# Altium PCB BaseBoard.PcbDoc (part 1 of 2)
Units mm, origin at the board's own origin, x right, y up, seen from the top; angles counter-clockwise.
Board outline 100 x 100 mm, 2 copper layers (Top Layer, Bottom Layer); 106 components, 85 nets, 460 pads, 124 vias.
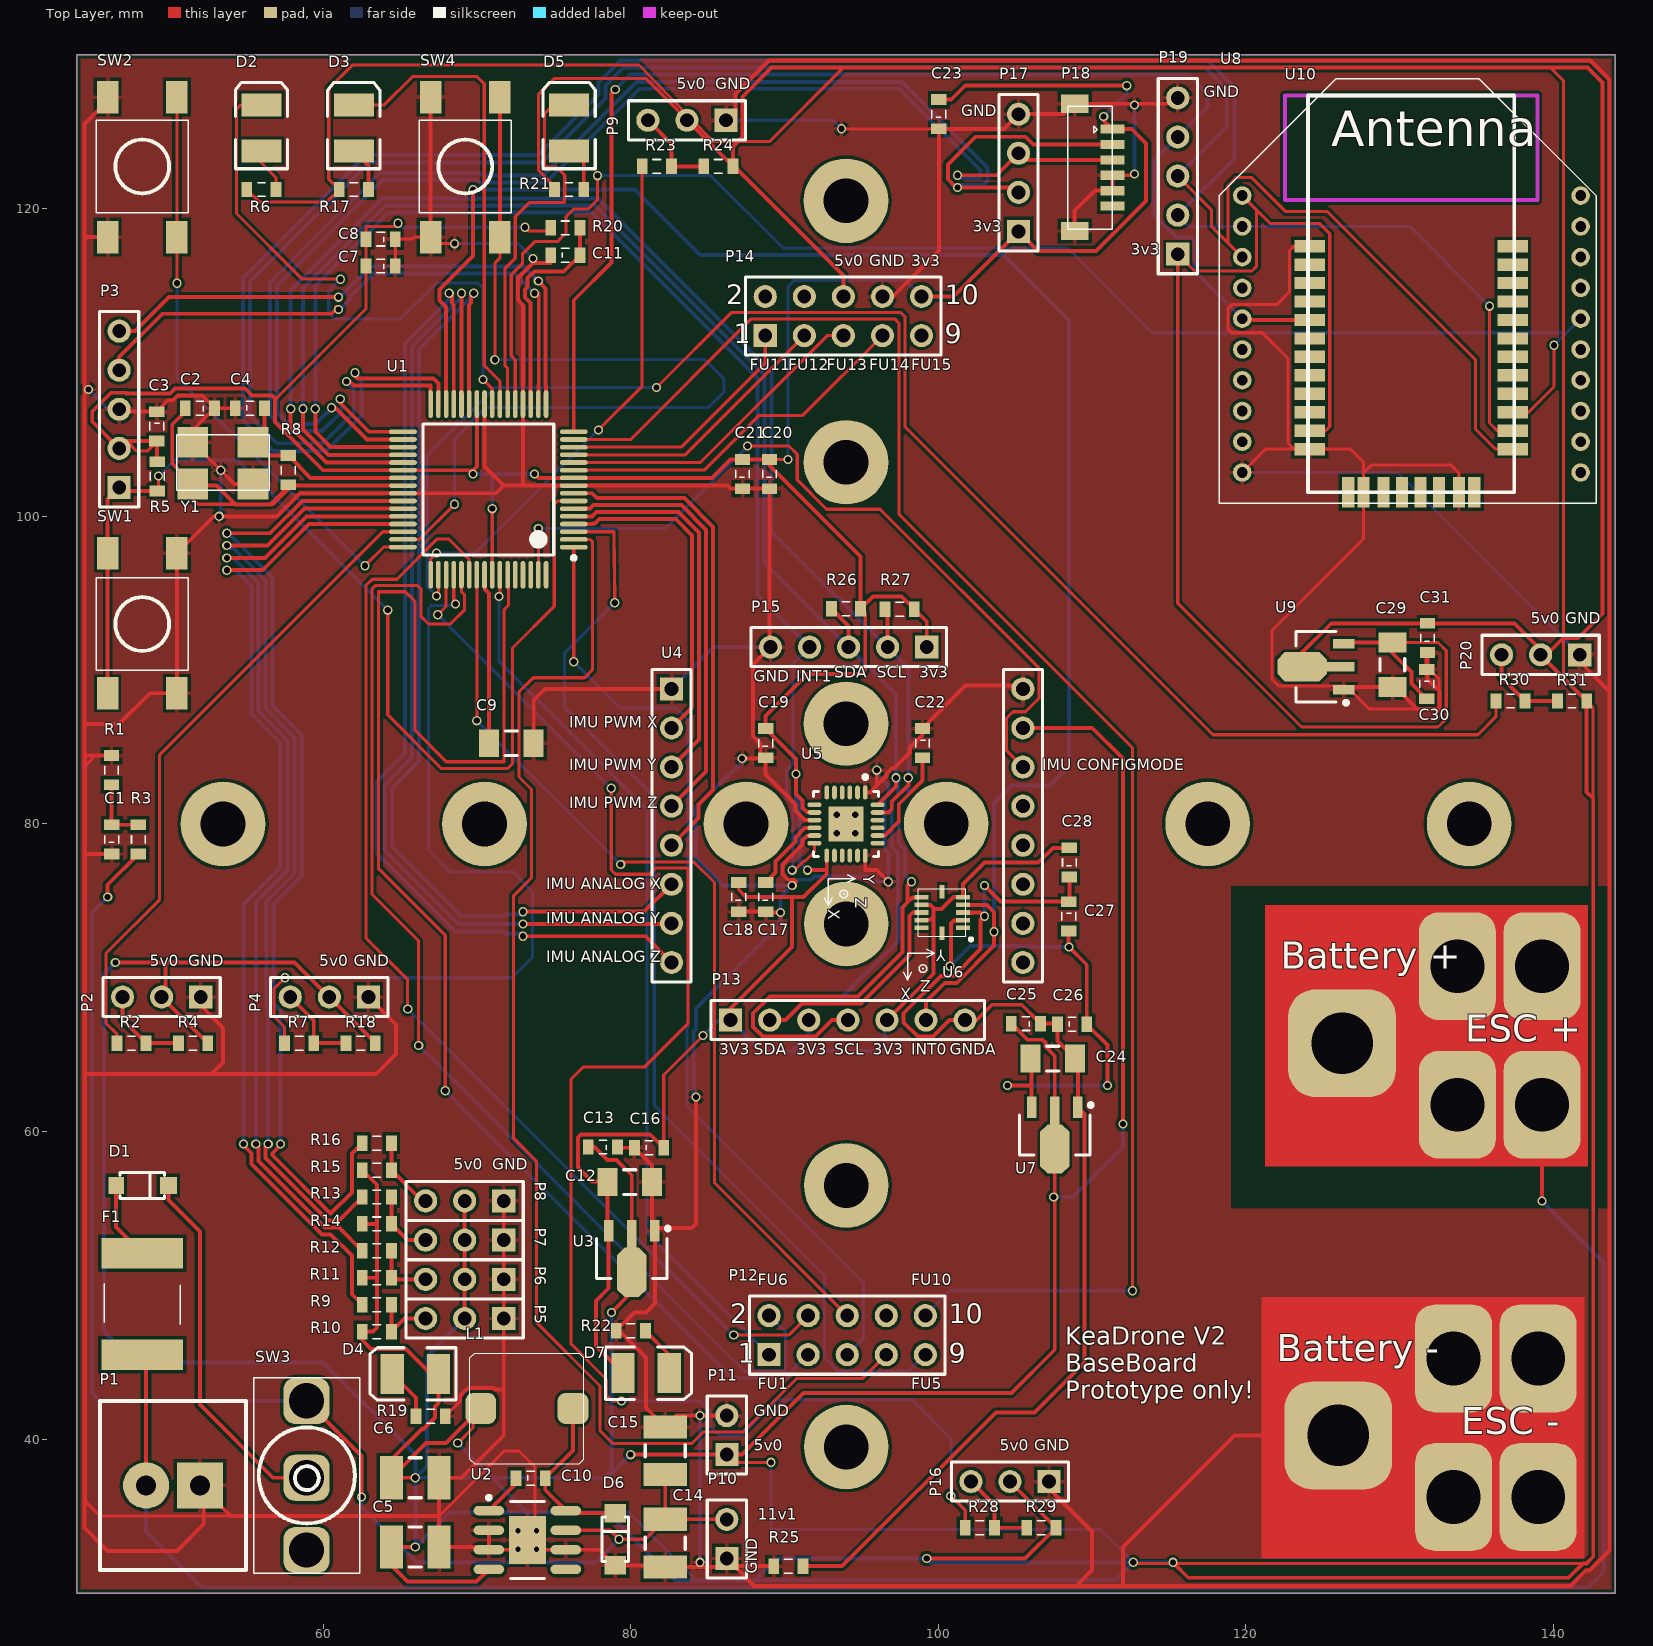
[diagram p0: Top Layer view]
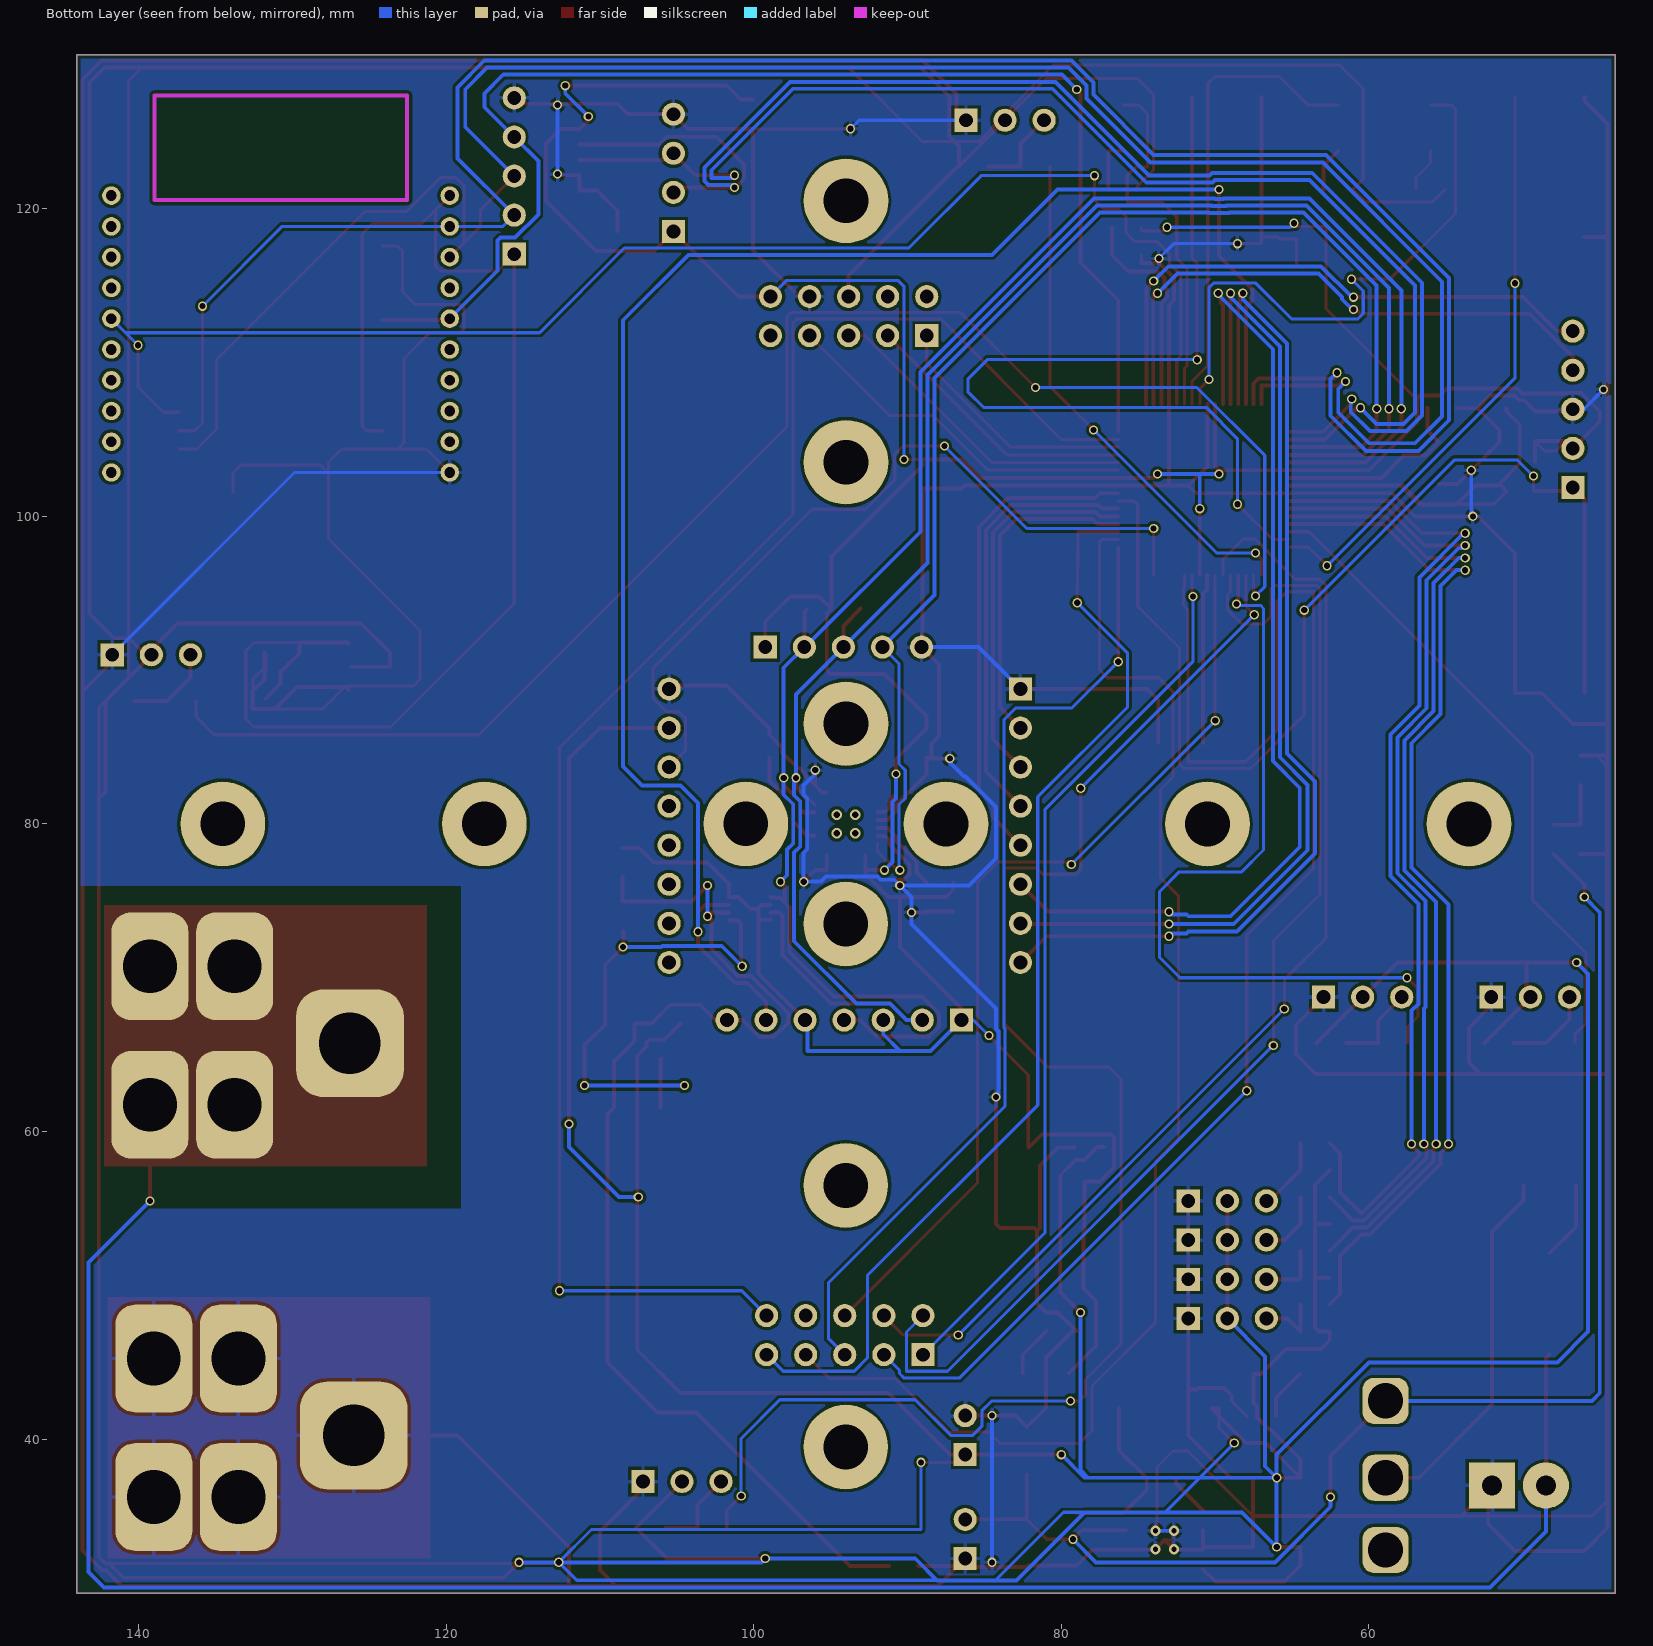
[diagram p1: Bottom Layer view, seen from below]
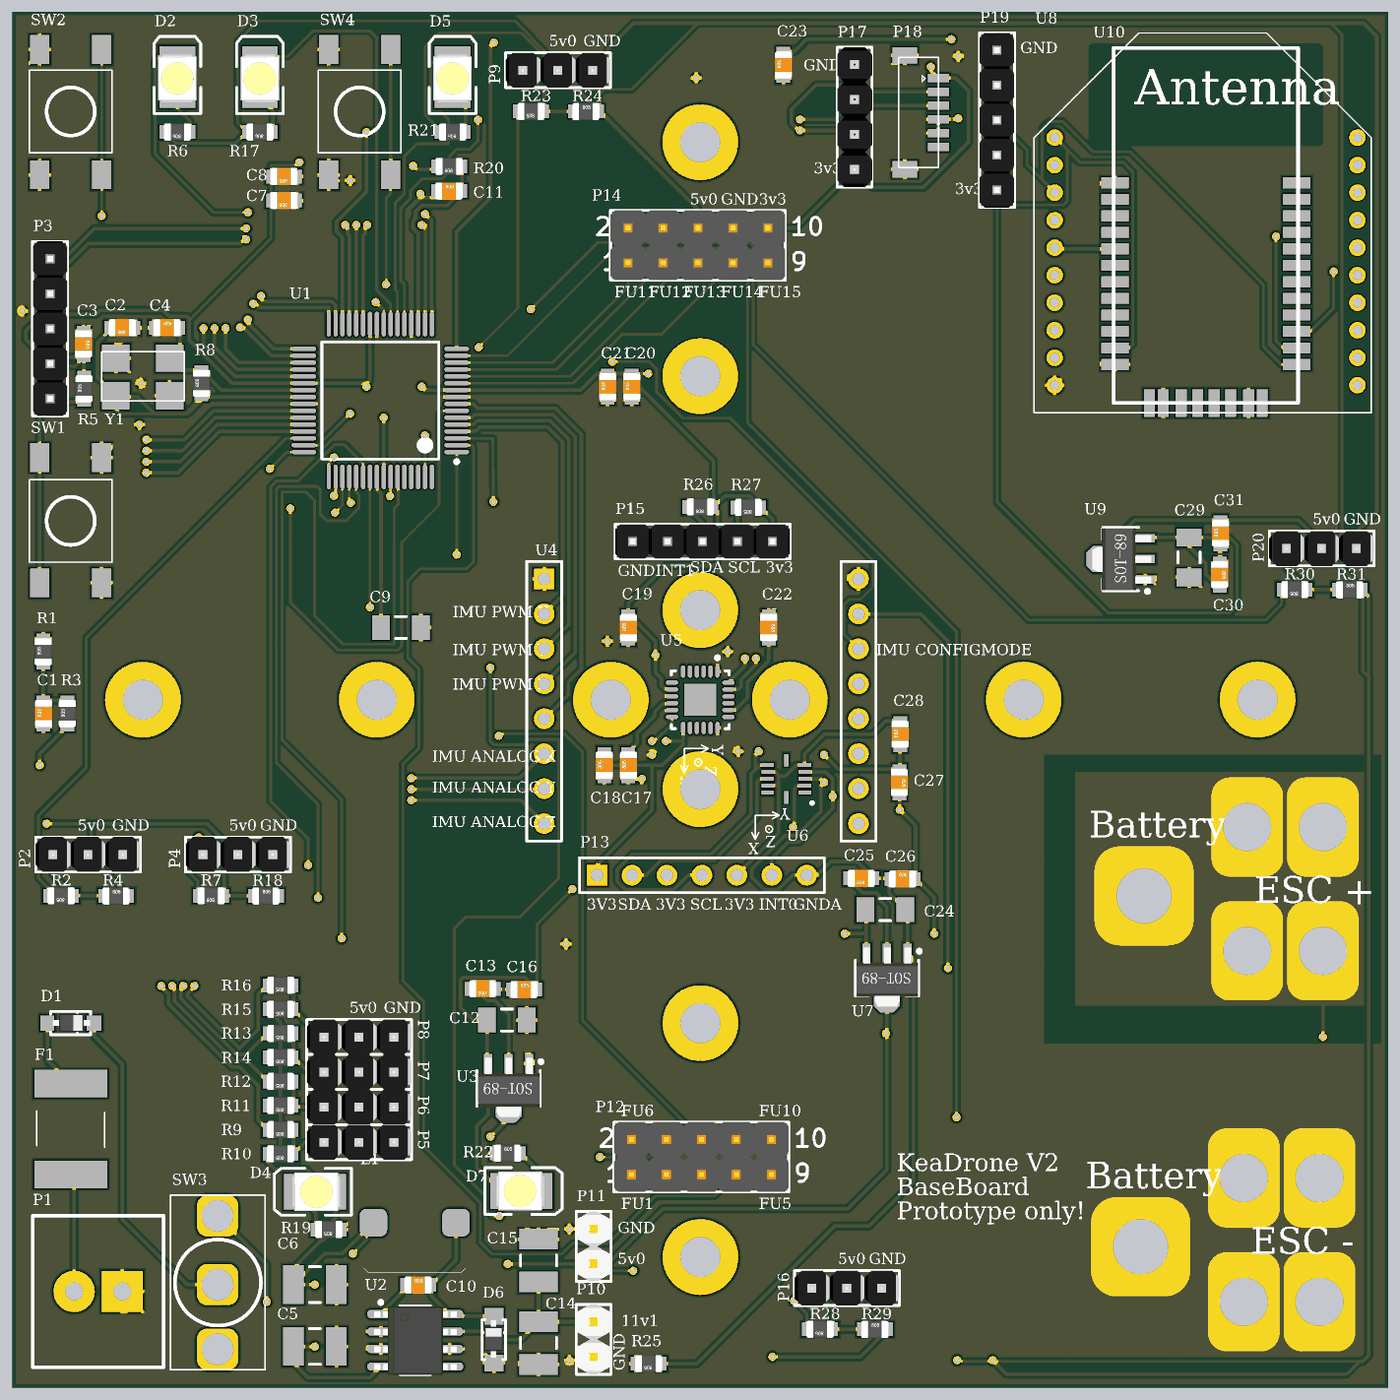
[diagram p3: 3D render of the assembled board from above, using the file's embedded part models]

## Layer stack, top to bottom
Top Layer: signal copper 0.0356
Dielectric: dielectric 0.32, FR-4, Dk 4.8
Bottom Layer: signal copper 0.0356

## Board outline
44,30 44,130 144,130 144,30

## Design rules (kind name [scope] priority, off if disabled: settings)
Clearance [All] p1: gap=0.2
ComponentClearance ComponentClearance_1 [InComponent('P4.13') or InComponent('P4.14') or InComponent('P4.15') or InComponent('P4.16')] p1: gap=0 collisioncheckmode=3 verticalgap=2540 showdistances=FALSE
ComponentClearance [All] p2: gap=0.254 collisioncheckmode=3 verticalgap=0.254 showdistances=FALSE
MinimumAnnularRing [All] p1: minimumring=0.1
PolygonConnect [All] p1: connectstyle=Relief reliefconductorwidth=0.254 reliefentries=4 polygonreliefangle="90 Angle"
RoomDefinition ServoConnector4 [InComponentClass('ServoConnector4')] p1: confinementstyle=ConfineIn formatcopy=TRUE lockcomponents=FALSE outline 100.496,35.626 100.496,38.874 108.824,38.874 108.824,35.626 108.356,33.361 105.044,33.361 101.044,33.381
RoomDefinition ServoConnector3 [InComponentClass('ServoConnector3')] p2: confinementstyle=ConfineIn formatcopy=TRUE lockcomponents=FALSE outline 134.996,89.376 134.996,92.624 143.324,92.624 143.324,89.376 142.856,87.111 139.544,87.111 135.544,87.131
RoomDefinition ServoConnector9 [InComponentClass('ServoConnector9')] p3: confinementstyle=ConfineIn formatcopy=TRUE lockcomponents=FALSE outline 56.246,67.126 56.246,70.374 64.574,70.374 64.574,67.126 64.106,64.861 60.794,64.861 56.794,64.881
RoomDefinition "U_Zigbee interface" [InComponentClass('U_Zigbee interface')] p4: confinementstyle=ConfineIn formatcopy=TRUE lockcomponents=FALSE outline 113.75,100.5 143.25,100.5 143.25,129 113.75,129
RoomDefinition "U_Subsheets combined" [InComponentClass('U_Subsheets combined')] p5 off: confinementstyle=ConfineIn formatcopy=TRUE lockcomponents=FALSE outline 181.244,38.337 181.244,38.75 208.856,38.75 214.354,38.746 248.104,37.923 248.104,36.17 228.206,35.361 224.894,35.361 191.496,35.364
RoomDefinition "U_PIC programmer in-circuit" [InComponentClass('U_PIC programmer in-circuit')] p6: confinementstyle=ConfineIn formatcopy=TRUE lockcomponents=FALSE outline 45.126,100.256 45.126,113.664 48.374,113.664 50.064,107.512 50.104,104.262 50.104,100.95 48.374,100.256
RoomDefinition "U_Oscillator 8mhz SMT" [InComponentClass('U_Oscillator 8mhz SMT')] p7: confinementstyle=ConfineIn formatcopy=TRUE lockcomponents=FALSE outline 50.169,100.744 50.169,106.181 50.344,107.909 56.906,107.909 56.906,106.151 56.806,100.744 53.656,99.111 50.344,99.111
RoomDefinition "U_GYRO 3-AXIS - ITG-3200" [InComponentClass('U_GYRO 3-AXIS - ITG-3200')] p8: confinementstyle=ConfineIn formatcopy=TRUE lockcomponents=FALSE outline 86.151,73.594 86.151,76.906 87.466,93.124 92.344,94.889 95.656,94.889 99.146,94.851 100.874,93.124 100.874,89.876 99.849,83.594 97.304,73.475 90.696,73.475
RoomDefinition "U_GPS Connector - LS20031" [InComponentClass('U_GPS Connector - LS20031')] p9: confinementstyle=ConfineIn formatcopy=TRUE lockcomponents=FALSE outline 99.25,117 112.331,117 112.331,129.319 99.25,129.319
RoomDefinition "U_Bluetooth interface - RN42" [InComponentClass('U_Bluetooth interface - RN42')] p10: confinementstyle=ConfineIn formatcopy=TRUE lockcomponents=FALSE outline 122.232,100.294 139.25,100.294 139.25,129.25 122.232,129.25
RoomDefinition "U_Battery Voltage 12v Max" [InComponentClass('U_Battery Voltage 12v Max')] p11: confinementstyle=ConfineIn formatcopy=TRUE lockcomponents=FALSE outline 48.864,73.899 48.864,85.329 45.562,85.329 45.562,73.899
RoomDefinition "U_Accelerometer 3-AXIS - BMA180" [InComponentClass('U_Accelerometer 3-AXIS - BMA180')] p12: confinementstyle=ConfineIn formatcopy=TRUE lockcomponents=FALSE outline 84.876,65.626 84.876,68.874 97.275,76.406 107.651,79.156 109.409,79.156 109.409,75.844 109.349,72.344 103.364,65.626
RoomDefinition ServoConnector8 [InComponentClass('ServoConnector8')] p13: confinementstyle=ConfineIn formatcopy=TRUE lockcomponents=FALSE outline 61.844,46.131 61.844,49.639 65.156,49.639 73.12,49.22 73.12,46.48 65.156,46.131
RoomDefinition ServoConnector7 [InComponentClass('ServoConnector7')] p14: confinementstyle=ConfineIn formatcopy=TRUE lockcomponents=FALSE outline 61.75,49 73.25,49 73.25,53.25 61.75,53.25
RoomDefinition ServoConnector6 [InComponentClass('ServoConnector6')] p15: confinementstyle=ConfineIn formatcopy=TRUE lockcomponents=FALSE outline 61.75,51.5 73.25,51.5 73.25,56.75 61.75,56.75
RoomDefinition ServoConnector5 [InComponentClass('ServoConnector5')] p16: confinementstyle=ConfineIn formatcopy=TRUE lockcomponents=FALSE outline 61.75,54 73.25,54 73.25,60.25 61.75,60.25
RoomDefinition ServoConnector2 [InComponentClass('ServoConnector2')] p17: confinementstyle=ConfineIn formatcopy=TRUE lockcomponents=FALSE outline 79.496,124.126 79.496,127.374 87.824,127.374 87.824,124.126 87.356,121.861 84.044,121.861 80.044,121.881
RoomDefinition ServoConnector1 [InComponentClass('ServoConnector1')] p18: confinementstyle=ConfineIn formatcopy=TRUE lockcomponents=FALSE outline 45.346,67.126 45.346,70.374 53.674,70.374 53.674,67.126 53.206,64.861 49.894,64.861 45.894,64.881
RoomDefinition "PWR Entry" [InComponentClass('PWR Entry')] p19 off: confinementstyle=ConfineIn formatcopy=TRUE lockcomponents=FALSE outline 45,31 55.5,31 55.5,57.75 45,57.75
RoomDefinition "PSU 5v1A" [InComponentClass('PSU 5v1A')] p20: confinementstyle=ConfineIn formatcopy=TRUE lockcomponents=FALSE outline 62.75,30 88,30 88,46 62.75,46
RoomDefinition "PSU 3v3A" [InComponentClass('PSU 3v3A')] p21: confinementstyle=ConfineIn formatcopy=TRUE lockcomponents=FALSE outline 104.044,67.909 107.356,67.909 110.356,67.849 110.424,62.833 110.424,56.725 104.716,56.725 104.044,66.151
RoomDefinition "PSU 3v3-xBee" [InComponentClass('PSU 3v3-xBee')] p22: confinementstyle=ConfineIn formatcopy=TRUE lockcomponents=FALSE outline 132.684,93.75 132.684,90.439 132.624,87.439 127.608,87.37 121.5,87.37 121.5,93.078 130.926,93.75
RoomDefinition "PSU 3v3" [InComponentClass('PSU 3v3')] p23: confinementstyle=ConfineIn formatcopy=TRUE lockcomponents=FALSE outline 76.544,59.884 79.856,59.884 82.856,59.824 82.924,54.808 82.924,48.7 77.216,48.7 76.544,58.126
RoomDefinition main [InComponentClass('main')] p24 off: confinementstyle=ConfineIn formatcopy=TRUE lockcomponents=FALSE outline 187.444,90.344 187.444,102.256 204.594,122.159 216.594,122.389 219.906,122.389 245.296,119.164 245.546,52.914 245.546,47.126 228.503,47.126
RoutingVias [All] p1: holewidth=0.4 width=0.6 viastyle="Through Hole" minholewidth=0.4 minwidth=0.6 maxholewidth=1.4 maxwidth=2
SilkToSilkClearance SilkToSilkClearance_1 [(InComponent('P4.13') AND InComponent('P4.14') AND InComponent('P4.15') AND InComponent('P4.16'))] p1: silktosilkclearance=0
SilkToSilkClearance [All] p2: silktosilkclearance=0.254
SilkscreenOverComponentPads [All] p1: minsilkscreentomaskgap=0.254
SolderMaskExpansion [All] p1: expansion=0.102
Width [All] p1: maxlimit=2 minlimit=0.2 preferedwidth=0.2
25 further rules are at their usual default settings.

## Classes and differential pairs
component class ServoConnector9: P4 R7 R18
channel class ServoConnector: ServoConnector1 ServoConnector2 ServoConnector3 ServoConnector4 ServoConnector5 ServoConnector6 ServoConnector7 ServoConnector8 ServoConnector9
channel class "Regulator 3v3-250mA MCP1702": "PSU 3v3" "PSU 3v3-xBee" "PSU 3v3A"
net class SW[1..2]: SW1 SW2
net class SERVOSIG[1..9]: SERVOSIG1 SERVOSIG2 SERVOSIG3 SERVOSIG4 SERVOSIG5 SERVOSIG6 SERVOSIG7 SERVOSIG8 SERVOSIG9
net class LED[1..3]: LED1 LED2 LED3
component class "U_Zigbee interface": P19 U8
component class "U_Subsheets combined": D2 D3 D4 D5 D7 R6 R17 R19 R21 R22 R25 SW2 SW3 SW4 U4
component class "U_PIC programmer in-circuit": C3 P3 R5
component class "U_Oscillator 8mhz SMT": C2 C4 R8 Y1
component class "U_GYRO 3-AXIS - ITG-3200": C17 C18 C19 C22 P15 R26 R27 U5
component class "U_GPS Connector - LS20031": C23 P17 P18
component class "U_Bluetooth interface - RN42": U10
component class "U_Battery Voltage 12v Max": C1 R1 R3
component class "U_Accelerometer 3-AXIS - BMA180": C27 C28 P13 U6
component class ServoConnector8: P5 R9 R10
component class ServoConnector7: P6 R11 R12
component class ServoConnector6: P7 R13 R14
component class ServoConnector5: P8 R15 R16
component class ServoConnector4: P16 R28 R29
component class ServoConnector3: P20 R30 R31
component class ServoConnector2: P9 R23 R24
component class ServoConnector1: P2 R2 R4
component class "PWR Entry": D1 F1 P1
component class "PSU 5v1A": C5 C6 C10 C14 C15 D6 L1 P10 P11 U2
component class "PSU 3v3": C12 C13 C16 U3
component class "PSU 3v3A": C24 C25 C26 U7
component class "PSU 3v3-xBee": C29 C30 C31 U9
component class main: C7 C8 C9 C11 C20 C21 P12 P14 R20 SW1 U1

## Components (designator, comment, footprint, x,y, rotation, side; value= is the part's Value field where it differs from the comment)
C1 "100n" C0805 46.25,79 r90 top (schematic designator C9)
C2 "18p" C0805 52,107 r180 top (schematic designator C1)
C3 "100n" C0805 49.215,105.856 r270 top (schematic designator C6)
C4 "18p" C0805 55.25,107.06 r0 top (schematic designator C2)
C5 "Low ESR 10uF" C1210 66,33 r180 top (schematic designator C17)
C6 "Low ESR 10uF" C1210 66,37.5 r180 top (schematic designator C18)
C7 "100n" C0805 63.75,116.25 r180 top (schematic designator C5)
C8 "100n" C0805 63.75,118 r180 top (schematic designator C6)
C9 "10uF" C1206 72.25,85.25 r180 top (schematic designator C1)
C10 "Very low ESR 100nF" C0805 73.5,37.5 r0 top (schematic designator C14)
C11 "100n" C0805 75.75,117 r0 top (schematic designator C2)
C12 "10uF" C1206 79.95,56.725 r180 top (schematic designator C22)
C13 "100n" C0805 78.2,58.975 r180 top (schematic designator C20)
C14 "Very low ESR 2u2" C1210 82.25,33.25 r90 top (schematic designator C16)
C15 "Very low ESR 2u2" C1210 82.25,39.25 r270 top
C16 "100n" C0805 81.2,58.975 r0 top (schematic designator C21)
C17 "100n" C0805 88.75,75.25 r90 top (schematic designator C11)
C18 "100n" C0805 87,75.25 r90 top (schematic designator C13)
C19 "10n" C0805 88.75,85.25 r90 top (schematic designator C10)
C20 "100n" C0805 89,102.75 r90 top (schematic designator C3)
C21 "100n" C0805 87.25,102.75 r90 top (schematic designator C4)
C22 "2n2" C0805 99,85.25 r270 top (schematic designator C12)
C23 "100n" C0805 100.012,126.144 r90 top (schematic designator C19)
C24 "10uF" C1206 107.45,64.75 r180 top (schematic designator C22)
C25 "100n" C0805 105.7,67 r180 top (schematic designator C20)
C26 "100n" C0805 108.7,67 r0 top (schematic designator C21)
C27 "22n" C0805 108.5,74 r270 top (schematic designator C7)
C28 "22n" C0805 108.5,77.5 r90 top (schematic designator C8)
C29 "10uF" C1206 129.525,90.344 r90 top (schematic designator C22)
C30 "100n" C0805 131.775,89.094 r270 top (schematic designator C21)
C31 "100n" C0805 131.775,92.094 r90 top (schematic designator C20)
D1 "PMEG4030ER" SOD123W 48.25,56.5 r0 top
D2 "" PLCC2 56,125.25 r90 top (schematic designator D6)
D3 "" PLCC2 62,125.25 r90 top (schematic designator D5)
D4 "" PLCC2 66,44.25 r180 top (schematic designator D3)
D5 "" PLCC2 76,125.25 r90 top (schematic designator D7)
D6 "PMEG3020EH 3A" SOD123F 79,33.5 r90 top (schematic designator D2)
D7 "" PLCC2 81.01,44.297 r0 top (schematic designator D4)
F1 "SMT 1.5A" F_2920L185 48.25,45.5 r90 top
L1 "inductor" Square_7.3x7.3x4.5 68.25,37 r90 top
P1 "Terminal Block" TB2_3.5 52,37 r180 top (schematic designator P3)
P2 "Pin Header" PH1x3_2.54 52.05,68.75 r180 top (schematic designator P4)
P3 "Pin Header" PH1x5_2.54 46.75,101.88 r90 top (schematic designator P1)
P4 "Pin Header" PH1x3_2.54 62.95,68.75 r180 top
P5 "Pin Header" PH1x3_2.54 71.75,47.85 r180 top (schematic designator P4)
P6 "Pin Header" PH1x3_2.54 71.75,50.4 r180 top (schematic designator P4)
P7 "Pin Header" PH1x3_2.54 71.75,52.95 r180 top (schematic designator P4)
P8 "Pin Header" PH1x3_2.54 71.75,55.5 r180 top (schematic designator P4)
P9 "Pin Header" PH1x3_2.54 86.2,125.75 r180 top (schematic designator P4)
P10 "Pin Header" PH1x2_2.54 86.25,32.25 r90 top (schematic designator P5)
P11 "Pin Header" PH1x2_2.54 86.25,39 r90 top (schematic designator P6)
P12 "Pin Header" PH2x5_2.54 89,45.5 r0 top (schematic designator P10)
P13 "Pin Header" PH1x7_2.54 86.5,67.25 r0 top (schematic designator P1)
P14 "Pin Header" PH2x5_2.54 88.75,111.75 r0 top (schematic designator P11)
P15 "Pin Header" PH1x5_2.54 99.25,91.5 r180 top (schematic designator P2)
P16 "Pin Header" PH1x3_2.54 107.2,37.25 r180 top (schematic designator P4)
P17 "Pin Header" PH1x4_2.54 105.219,118.524 r90 top (schematic designator P9)
P18 "GPS Connector" GPScon-BM06B-SRSS-TB 111.315,120.175 r90 top (schematic designator P8)
P19 "Pin Header" PH1x5_2.54 115.568,117.042 r90 top (schematic designator P7)
P20 "Pin Header" PH1x3_2.54 141.7,91 r180 top (schematic designator P4)
R1 "RESISTOR" R0805 46.25,83.5 r90 top (schematic designator R3)
R2 "RESISTOR" R0805 47.55,65.75 r180 top (schematic designator R6)
R3 "RESISTOR" R0805 48,79 r90 top (schematic designator R2)
R4 "RESISTOR" R0805 51.55,65.75 r0 top (schematic designator R7)
R5 "RESISTOR" R0805 49.215,102.606 r90 top (schematic designator R1)
R6 "RESISTOR" R0805 56,121.25 r180 top (schematic designator R12)
R7 "RESISTOR" R0805 58.45,65.75 r180 top (schematic designator R6)
R8 "RESISTOR" R0805 57.75,103 r90 top (schematic designator R1)
R9 "RESISTOR" R0805 63.5,48.75 r180 top (schematic designator R6)
R10 "RESISTOR" R0805 63.5,47 r180 top (schematic designator R7)
R11 "RESISTOR" R0805 63.5,50.5 r180 top (schematic designator R7)
R12 "RESISTOR" R0805 63.5,52.25 r180 top (schematic designator R6)
R13 "RESISTOR" R0805 63.5,55.75 r180 top (schematic designator R6)
R14 "RESISTOR" R0805 63.5,54 r180 top (schematic designator R7)
R15 "RESISTOR" R0805 63.5,57.5 r180 top (schematic designator R7)
R16 "RESISTOR" R0805 63.5,59.25 r180 top (schematic designator R6)
R17 "RESISTOR" R0805 62,121.25 r180 top (schematic designator R10)
R18 "RESISTOR" R0805 62.45,65.75 r0 top (schematic designator R7)
R19 "RESISTOR" R0805 67,41.5 r180 top (schematic designator R8)
R20 "RESISTOR" R0805 75.75,118.75 r180 top (schematic designator R1)
R21 "RESISTOR" R0805 76,121.25 r180 top (schematic designator R13)
R22 "RESISTOR" R0805 80.01,47.047 r0 top (schematic designator R9)
R23 "RESISTOR" R0805 81.7,122.75 r180 top (schematic designator R6)
R24 "RESISTOR" R0805 85.7,122.75 r0 top (schematic designator R7)
R25 "RESISTOR" R0805 90.25,31.75 r180 top (schematic designator R11)
R26 "RESISTOR" R0805 94,94 r180 top (schematic designator R4)
R27 "RESISTOR" R0805 97.49,93.962 r180 top (schematic designator R5)
R28 "RESISTOR" R0805 102.7,34.25 r180 top (schematic designator R6)
R29 "RESISTOR" R0805 106.7,34.25 r0 top (schematic designator R7)
R30 "RESISTOR" R0805 137.2,88 r180 top (schematic designator R6)
R31 "RESISTOR" R0805 141.2,88 r0 top (schematic designator R7)
SW1 "SMT" "SWITCH TACT" 50.5,88.5 r180 top
SW2 "Tact. SMT" "SWITCH TACT" 46,127.25 r0 top (schematic designator SW3)
SW3 "Power Switch" 1MS1T1B5M1QE 55.5,44 r0 top (schematic designator SW4)
SW4 "Tact. SMT" "SWITCH TACT" 67,127.25 r0 top (schematic designator SW2)
U1 "PIC32MX320F064H-80I/PT" TQFP-PT64_N 70.75,101.75 r180 top
U2 "LM22672MR-5.0" MRA08B_N 73.284,33.453 r0 top (schematic designator U4)
U3 "MCP1702T-3302E/MB" SOT-89-MB3_N 80.07,51.754 r270 top (schematic designator U7)
U4 "Exteternal Heading module" Keadrone_IMUv1 76.5,104.5 r0 top (schematic designator U5)
U5 "GYRO 3-AXIS (ITG-3200)" "QFN50P400X400-24V2M - GYRO 3axis" 94,80 r270 top (schematic designator U3)
U6 "Accelerometer 3-AXIS (BMA180)" BMA180 100.25,74.25 r180 top (schematic designator U2)
U7 "MCP1702T-3302E/MB" SOT-89-MB3_N 107.57,59.779 r270 top
U8 "Zigbee 2.4Ghz" Zigbee_maxstream 119.759,120.852 r0 top (schematic designator U6)
U9 "MCP1702T-3302E/MB" SOT-89-MB3_N 124.554,90.224 r180 top (schematic designator U7)
U10 "Bluetooth SSP" BlueTooth_RN4x 137.345,117.566 r0 top (schematic designator U8)
Y1 "" Osc-SMT-6x3.6x1.2 53.5,103.5 r0 top

## Footprints (in the part's own frame and the unit in brackets; to place one, negate y for a bottom-side part, rotate by r counter-clockwise, add the part's x,y. Pads: shape width x height; smd on the part's side, far side on the other; paste and mask are expansions set on the pad)
1MS1T1B5M1QE [mm] "Switch, toggle, multicomp, 2A"
  rrect50% 3x3 hole 2.3: 1(3.425,-6.5) 2(3.425,-1.5) 3(3.425,-11.2)
  silkscreen extent 0,-12.7 6.87,0, body extent 0,-12.7 6.87,0, height 24
BlueTooth_RN4x [mm] "Bluetooth, module"
  rect 2x0.8 smd: 1(-13.2,0) 2(-13.2,-1.2) 3(-13.2,-2.4) 4(-13.2,-3.6) 5(-13.2,-4.8) 6(-13.2,-6) 7(-13.2,-7.2) 8(-13.2,-8.4) 9(-13.2,-9.6) 10(-13.2,-10.8) 11(-13.2,-12) 12(-13.2,-13.2) 13(0,-13.2) 14(0,-12) 15(0,-10.8) 16(0,-9.6) 17(0,-8.4) 18(0,-7.2) 19(0,-6) 20(0,-4.8) 21(0,-3.6) 22(0,-2.4) 23(0,-1.2) 24(0,0)
  rect 0.8x2 smd: 28(-3.5,-16) 29(-9.7,-16) 30(-2.5,-16) 31(-4.8,-16) 32(-6,-16) 33(-7.2,-16) 34(-8.4,-16) 35(-10.7,-16)
  Keep-Out Layer lines w0.254: -14.8,3 1.6,3 1.6,9.8 -14.8,9.8 -14.8,3
  silkscreen extent -13.3,-16 0.1,9.8
BMA180 [mm]
  rect 0.9x0.3 smd: 1(-1.35,1) 2(-1.35,0.5) 3(-1.35,0) 4(-1.35,-0.5) 5(-1.35,-1) 7(1.35,-1) 8(1.35,-0.5) 9(1.35,0) 10(1.35,0.5) 11(1.35,1)
  rect 0.32x0.9 smd: 6(0,-1.35) 12(0,1.35)
  silkscreen extent -1.95,-1.55 2.5,4.4, body extent -1.55,-1.55 1.55,1.55, height 1
C0805 [mm] "Chip Capacitor; Body 2.0 x 1.2 mm (LxW typ)"
  rect 0.7x1 smd: 1(-0.95,-0.025) 2(0.95,-0.025)
  silkscreen extent -0.25,-0.47 0.25,0.42, body extent -1,-0.65 1,0.6, height 0.78
C1206 [mm] "Chip Capacitor, Body 3.2x1.6mm, IPC Medium Density"
  rect 1.3x1.8 smd: 1(-1.45,0) 2(1.45,0)
  silkscreen extent -0.4,-0.8 0.4,0.8, body extent -1.7,-0.9 1.7,0.9, height 1.35
C1210 [mm] "Chip Capacitor, Body 3.2x2.5mm, IPC Low Density"
  rect 1.5x2.8 smd: 1(-1.55,0) 2(1.55,0)
  silkscreen extent -0.4,-1.3 0.4,1.3, body extent -1.7,-1.35 1.7,1.35, height 1.35
F_2920L185 [mm] "Fuses, 2920L185"
  rect 2x5.3 smd: 1(0,0) 2(6.6,0)
  silkscreen extent 1.97,-2.48 4.63,2.47, body extent -0.45,-2.63 7.05,2.6, height 1.25
GPScon-BM06B-SRSS-TB [mm] "Connector; SMT; pitch 1mm; SH Connector; Top Entrance"
  rect 1.2x1.8 smd: 0(-1.625,2.45) 0(6.65,2.45)
  rect 0.6x1.55 smd: A1(5,0) A2(4,0) A3(3,0) A4(2,0) A5(1,0) A6(0,0)
  silkscreen extent -1.5,0 6.5,2.9
Keadrone_IMUv1 [mm] "Gyro"
  rect 1.5x1.5 hole 0.9: 1(6.16,-15.72)
  round 1.5 hole 0.9: 2(6.16,-18.26) 3(6.16,-20.8) 4(6.16,-23.34) 5(6.16,-25.88) 6(6.16,-28.42) 7(6.16,-30.96) 8(6.16,-33.5) 9(29,-33.5) 10(29,-30.96) 11(29,-28.42) 12(29,-25.88) 13(29,-23.34) 14(29,-20.8) 15(29,-18.26) 16(29,-15.72)
  silkscreen extent 4.89,-34.77 30.27,-14.45, body extent -0.05,-50.05 35.05,0.05, height 18
MRA08B_N [mm] "SOIC, 8-Leads, Body 4.9x3.9mm, Pitch 1.27mm, Exposed Pad, IPC Medium Density"
  oval 2x0.6 smd: 1(-2.5,1.905) 2(-2.5,0.635) 3(-2.5,-0.635) 4(-2.5,-1.905) 5(2.5,-1.905) 6(2.5,-0.635) 7(2.5,0.635) 8(2.5,1.905)
  rect 2.41x3.1 smd: 9(0,0)
  silkscreen extent -2.62,-2.5 1.1,2.88, body extent -2.98,-2.52 3.03,2.48, height 1.75
Osc-SMT-6x3.6x1.2 [mm] "Oscillator, Osc-SMT-6x3.6x1.2"
  rect 2x2 smd: 1(-1.975,-1.4) 2(1.95,-1.4) 3(1.95,1.325) 4(-1.975,1.325)
  silkscreen extent -3,-1.8 3,1.8, body extent -3,-1.8 3,1.8, height 2
PH1x2_2.54 [mm] "Connector; Header; 2 Position"
  rect 1.5x1.5 hole 0.9: 1(0,0)
  round 1.5 hole 0.9: 2(2.54,0)
  silkscreen extent -1.27,-1.27 3.81,1.27, body extent -1.27,-1.27 3.81,1.27, height 8.38
PH1x3_2.54 [mm] "Connector; Header; 3 Position"
  rect 1.5x1.5 hole 0.9: 1(0,0)
  round 1.5 hole 0.9: 2(2.54,0) 3(5.08,0)
  silkscreen extent -1.27,-1.27 6.35,1.27, body extent -1.27,-1.27 6.35,1.27, height 8.38
PH1x4_2.54 [mm] "Connector; Header; 4 Position"
  rect 1.5x1.5 hole 0.9: 1(0,0)
  round 1.5 hole 0.9: 2(2.54,0) 3(5.08,0) 4(7.62,0)
  silkscreen extent -1.27,-1.27 8.89,1.27, body extent -1.27,-1.27 8.89,1.27, height 8.38
PH1x5_2.54 [mm] "Connector; Header; 5 Position"
  rect 1.5x1.5 hole 0.9: 1(0,0)
  round 1.5 hole 0.9: 2(2.54,0) 3(5.08,0) 4(7.62,0) 5(10.16,0)
  silkscreen extent -1.27,-1.27 11.43,1.27, body extent -1.27,-1.25 11.43,1.25, height 8.52
PH1x7_2.54 [mm] "Connector; Header; 7 Position"
  rect 1.5x1.5 hole 0.9: 1(0,0)
  round 1.5 hole 0.9: 2(2.54,0) 3(5.08,0) 4(7.62,0) 5(10.16,0) 6(12.7,0) 7(15.24,0)
  silkscreen extent -1.27,-1.27 16.51,1.27
PH2x5_2.54 [mm] "Connector; Header; 5x2 Position"
  rect 1.5x1.5 hole 0.9: 1(0,0)
  round 1.5 hole 0.9: 2(0,2.54) 3(2.54,0) 4(2.54,2.54) 5(5.08,0) 6(5.08,2.54) 7(7.62,0) 8(7.62,2.54) 9(10.16,0) 10(10.16,2.54)
  silkscreen extent -1.27,-1.27 11.43,3.81, body extent -1.27,-1.27 11.43,3.81, height 10.1
PLCC2 [mm] "SM LED; 2 C-Bend Leads; Body 3.5 x 2.8 x 1.9 mm, inc leads (LxWxH typ)"
  rect 1.5x2.6 smd: 1(-1.5,0) 2(1.5,0)
  silkscreen extent -2.65,-1.7 2.95,1.7, body extent -1.85,-1.4 1.64,1.4, height 1.55
"QFN50P400X400-24V2M - GYRO 3axis" [mm] "QFN, 24-Leads, Body 4x4mm, Pitch 0.5mm, IPC Low Density"
  oval 0.9x0.3 smd: 1(-2.05,1.25) 2(-2.05,0.75) 3(-2.05,0.25) 4(-2.05,-0.25) 5(-2.05,-0.75) 6(-2.05,-1.25) 13(2.05,-1.25) 14(2.05,-0.75) 15(2.05,-0.25) 16(2.05,0.25) 17(2.05,0.75) 18(2.05,1.25)
  oval 0.3x0.9 smd: 7(-1.25,-2.05) 8(-0.75,-2.05) 9(-0.25,-2.05) 10(0.25,-2.05) 11(0.75,-2.05) 12(1.25,-2.05) 19(1.25,2.05) 20(0.75,2.05) 21(0.25,2.05) 22(-0.25,2.05) 23(-0.75,2.05) 24(-1.25,2.05)
  rect 2.3x2.3 smd: 25(0,0)
  silkscreen extent -3.17,-2.1 5.3,2.1, body extent -2.07,-2.07 2.07,2.07, height 1
R0805 [mm] "0805 SMD Resistor"
  rect 0.7x1 smd: 1(-0.95,0) 2(0.95,0)
  silkscreen extent -0.25,-0.45 0.25,0.45, body extent -1.01,-0.63 0.99,0.62, height 0.78
SOD123F [mm] "SOD-123; 2 Leads; Body 2.7 x 1.6 mm, (LxW)"
  rect 1.2x1.4 smd: 1(-1.7,0) 2(1.7,0)
  silkscreen extent -1.45,-0.85 1.45,0.85, body extent -1.3,-0.66 1.4,0.69, height 0.79
SOD123W [mm] "SOD-123; 2 Leads; Body 2.7 x 1.6 mm, (LxW)"
  rect 1x1.1 smd: 1(-1.7,0)
  rect 1.1x1.1 smd: 2(1.7,0)
  silkscreen extent -1.45,-0.85 1.45,0.85, body extent -1.3,-0.66 1.4,0.69, height 0.79
SOT-89-MB3_N [mm] "SOT89, 3-Leads, Body 4.5x2.4 mm, Pitch 1.5mm, Lead Span 4.1mm, IPC Medium Density"
  rect 1.4x0.6 smd: 1(-1.8,1.5) 3(-1.8,-1.5)
  rect 1.8x0.6 smd: 2(-1.6,0)
  oct 3.2x1.9 smd: 2(0.9,0)
  silkscreen extent -2.07,-2.3 1.3,2.48, body extent -2.22,-2.23 2.08,2.27, height 1.51
Square_7.3x7.3x4.5 [mm]
  rrect50% 2x2 smd: 1(5,-8) 2(5,-2)
  silkscreen extent 1.4,-8.7 8.6,-1.3
"SWITCH TACT" [mm] "Switch, Tactile"
  rect 1.4x2.1 smd: 1(0,0) 2(4.5,0) 3(4.5,-9.1) 4(0,-9.1)
  silkscreen extent -0.75,-7.5 5.25,-1.5, body extent -0.75,-7.5 5.25,-1.5, height 4.23
TB2_3.5 [mm] "Terminal Block 2 Pin 3.5mm"
  rect 3x3 hole 1.3: 1(0,0)
  round 3 hole 1.3: 2(3.5,0)
  silkscreen extent -3,-5.5 6.5,5.5, body extent -3,-5.5 6.5,5.5, height 12.8
TQFP-PT64_N [mm] "Thin QFP, 64-Leads, Body 10x10mm, Pitch 0.5mm, IPC Medium Density"
  oval 1.8x0.3 smd: 1(-5.55,3.75) 2(-5.55,3.25) 3(-5.55,2.75) 4(-5.55,2.25) 5(-5.55,1.75) 6(-5.55,1.25) 7(-5.55,0.75) 8(-5.55,0.25) 9(-5.55,-0.25) 10(-5.55,-0.75) 11(-5.55,-1.25) 12(-5.55,-1.75) 13(-5.55,-2.25) 14(-5.55,-2.75) 15(-5.55,-3.25) 16(-5.55,-3.75) 33(5.55,-3.75) 34(5.55,-3.25) 35(5.55,-2.75) 36(5.55,-2.25) 37(5.55,-1.75) 38(5.55,-1.25) 39(5.55,-0.75) 40(5.55,-0.25) 41(5.55,0.25) 42(5.55,0.75) 43(5.55,1.25) 44(5.55,1.75) 45(5.55,2.25) 46(5.55,2.75) 47(5.55,3.25) 48(5.55,3.75)
  oval 0.3x1.8 smd: 17(-3.75,-5.55) 18(-3.25,-5.55) 19(-2.75,-5.55) 20(-2.25,-5.55) 21(-1.75,-5.55) 22(-1.25,-5.55) 23(-0.75,-5.55) 24(-0.25,-5.55) 25(0.25,-5.55) 26(0.75,-5.55) 27(1.25,-5.55) 28(1.75,-5.55) 29(2.25,-5.55) 30(2.75,-5.55) 31(3.25,-5.55) 32(3.75,-5.55) 49(3.75,5.55) 50(3.25,5.55) 51(2.75,5.55) 52(2.25,5.55) 53(1.75,5.55) 54(1.25,5.55) 55(0.75,5.55) 56(0.25,5.55) 57(-0.25,5.55) 58(-0.75,5.55) 59(-1.25,5.55) 60(-1.75,5.55) 61(-2.25,5.55) 62(-2.75,5.55) 63(-3.25,5.55) 64(-3.75,5.55)
  silkscreen extent -5.68,-4.25 4.25,4.57, body extent -5,-5 5,5, height 1.2
Zigbee_maxstream [mm] "XBee 1mW Chip Antenna"
  round 1.2 hole 0.7: 1(0,0) 2(0,-2) 3(0,-4) 4(0,-6) 5(0,-8) 6(0,-10) 7(0,-12) 8(0,-14) 9(0,-16) 10(0,-18) 11(22,-18) 12(22,-16) 13(22,-14) 14(22,-12) 15(22,-10) 16(22,-8) 17(22,-6) 18(22,-4) 19(22,-2) 20(22,0)
  silkscreen extent -1.5,-20 23,7.6, body extent -1.5,-20 23,7.6, height 6

## Part data
C5 C6: library part 10uF-1210-X5R
C10: library part 0.01uF-0805-X7R
C14 C15: library part 2.2uF-1210-X7R
D2 D3 D4 D5 D7: library part Green-PLCC2, "LED, Surface Mount LED Indicator"
D6: library part PMEG3020EH
F1: library part 2920L185, "Fuse"
L1: library part 15uH-Shield-1.6A-Wurth, "Inductor"
P1: library part TB2, "Con1x2"
P2 P4 P5 P6 P7 P8 P9 P16 P20: library part PH1x3, "Con1x3"
P3 P15 P19: library part PH1x5, "Con1x5"
P10 P11: library part PH1x2, "Con1x2"
P12 P14: library part PH2x5, "Header, 5-Pin, Dual row"
P13: library part PH1x7, "Con1x7"
P17: library part PH1x4, "Con1x4"
P18: library part GPS-LS20031, "Header, 6-Pin; GPS; 1mm pitch; SMT; SH connector; Crimp"
R1: library part 22K, "Resistor"
R2 R7 R9 R12 R13 R16 R23 R28 R30: library part 100R, "Resistor"
R3: library part 100K, "Resistor"
R4 R10 R11 R14 R15 R18 R24 R29 R31: library part 1K, "Resistor"
R5: library part 10K, "Resistor"
R6 R17 R19 R21 R22: library part 470R, "Resistor"
R8: library part 1M, "Resistor"
R20: library part 10R, "Resistor"
R25: library part 1R, "Resistor"
R26 R27: library part 4K7, "Resistor"
SW1 SW2 SW4: library part "Pushbutton TACT", "Switch"
SW3: library part Toggle-Sw_1MS1T1B5M1QE, "Switch"
U1: "High Performance 80 MHz MIPS-Based 32-Bit Flash Microcontroller, 64KB Program Memory, 64-pin TQFP"
U2: library part LM22674MR-5.0, "Power, 500mA SIMPLE SWITCHER, Step-Down Voltage Regulator with Precision Enable"
U3 U7 U9: "Power, 250 mA Low Quiescent Current LDO Regulator, 3-Pin SOT-89, Extended Temperature, Tape and Reel"
U4: library part Keadrone-imu-v1
U5: library part ITG-3200, "Gyro, 3-axis"
U6: library part BMA180
U8: library part Zigbee-WRL-08690, "Wireless, zigbee module from Maxstream;"
U10: library part BlueTooth-RN42, "Wireless, Bluetooth"
Y1: library part ABMM2-8.000MHZ-E2-T, "Crystal Oscillator"

## Free pads (board coordinates)
  rrect50% 7x7 hole 4: 0(126,40.25) 0(126.25,65.75)
  rrect50% 5x7 hole 3.5: 1(133.5,36.25) 1(133.75,61.75) 1(139,36.25) 1(139.25,61.75) 2(133.5,45.25) 2(133.75,70.75) 2(139,45.25) 2(139.25,70.75)
  round 5.5 hole 2.9 unplated: 2(53.5,80) 2(70.5,80) 2(87.5,80) 2(94,86.514) 2(94,103.514) 2(94,120.514) 2(94.014,39.5) 2(94.014,56.5) 2(94.014,73.5) 2(100.507,80.007) 2(117.507,80.007) 2(134.507,80.007)

## Via types
v1: diameter 0.6, hole 0.4, Top Layer to Bottom Layer, 116 vias
v2: diameter 0.7, hole 0.4, Top Layer to Bottom Layer, tented top, 4 vias
v3: diameter 0.66, hole 0.33, Top Layer to Bottom Layer, tented top, 4 vias

## Nets (pads, with @x,y where several pads share a name; then routed paths per layer and width w, separated by ;. In a path a pad name is that pad's centre, name@x,y a point inside that pad or via, vN(x,y) a via of type N, cw(c..) or ccw(c..) an arc to the next point about the centre after c; other vN are vias at no path point)
3V3: C3.2 C7.2 C8.2 C12.2 C16.2 C18.2 C19.2 C20.2 C21.2 C23.2 C28.2 D7.1 P3.2 P13.1 P13.3 P13.5 P14.10 P15.1 P17.1 P18.A1 R5.2 R20.2 R26.1 R27.1 U1.10 U1.26 U1.38 U1.57 U3.3 U5.8 U5.13 U6.5 U6.8 U6.10 | length 307.5
  Top Layer w0.2: P3.2@46.75,104.42 46.38,104.42 46.38,104.906 P3.2@47.236,104.906 ; C3.2@49.19,104.906 P3.2@47.236,104.906 ; C3.2@49.215,104.881 48.576,104.242 47.9,104.242 P3.2@47.236,104.906 ; v1(64.872,119.05) 64.668,118.847 62.8,118.847 C8.2@62.8,118.025 C7.2@62.8,116.275 62.8,113.498 56.871,107.569 56.871,106.142 56.877,106.135 60.012,103 U1.38@65.2,103 ; v1(73.127,118.796) 73.381,118.542 74.8,118.542 R20.2@74.8,118.75 ; C16.2@82.15,58.95 82.15,63.684 v1(84.709,66.243) ; C20.2@89.025,103.7 v1(90.221,103.7)
  Top Layer w0.254: P3.2@46.75,104.42 45,106.17 45,106.824 46.213,108.037 47.196,108.037 47.233,108 50.071,108 50.376,108.306 54.944,108.306 55.388,107.862 56.685,107.862 56.877,107.67 56.877,106.135 60.012,103 U1.38@65.2,103 v1@69.75,103 ; P3.2@47.236,104.906 C3.2@49.19,104.906 ; R5.2@49.215,103.556 C3.2@49.215,104.881 ; v1(69.75,102.75) v1@69.75,103 ; U1.26@70,107.3 70,103.25 v1@69.75,103 ; U1.57@71,96.2 v1(71,100.5) ; v1(73.75,102.75) 74,102.5 U1.10@76.3,102.5 85.3,102.5 86.5,103.7 C21.2@87.275,103.7 C20.2@89.025,103.7 89.025,103.304 94.95,97.379 R26.1@94.95,94 ; D7.1@79.51,44.297 77.75,46.057 77.75,49 78.57,49.82 U3.3@78.57,53.554 78.5,53.624 C12.2@78.5,56.725 78.473,56.752 77.498,56.752 76.573,57.677 76.573,59.635 76.765,59.827 81.273,59.827 C16.2@82.15,58.95 ; P13.1@86.5,67.25 86.5,68 90.5,72 90.5,75.25 ; C18.2@87.025,76.2 87.025,75.725 87.5,75.25 90.5,75.25 ; v1(91.5,77) 92.75,77 ; U5.8@91.95,80.75 91.927,80.773 91.452,80.773 91.173,81.052 91.173,81.527 90.75,81.95 v1(90.75,83.25) 90.75,84.225 C19.2@88.775,86.2 88.775,87.025 91.5,89.75 95,89.75 95.25,90 95.25,93.7 R26.1@94.95,94 ; U5.13@92.75,77.95 92.75,77 ; P13.5@96.66,67.25 99.677,70.267 99.677,73.965 ; U6.10@98.9,73.75 98.923,73.773 99.485,73.773 99.677,73.965 ; U6.8@98.9,74.75 98.923,74.727 99.485,74.727 99.75,74.462 ; P14.10@98.91,114.29 100.985,114.29 P17.1@105.219,118.524 106.493,117.25 110.25,117.25 113.5,120.5 113.5,124.25 112.575,125.175 P18.A1@111.315,125.175 110.75,125.74 v1(110.75,126) ; P15.1@99.25,91.5 99.25,93.152 R27.1@98.44,93.962 97.602,94.8 95.75,94.8 R26.1@94.95,94 ; C23.2@100.037,127.094 100.844,127.094 101.75,128 v1(112.25,128) ; C28.2@108.525,78.45 107.45,78.45 106.5,77.5 103,77.5 101.6,76.1 U6.5@101.6,75.25 101,75.25 100.212,74.462 99.75,74.462 ; 90.5,75.25 91.25,75.25 92.75,76.75 92.75,77 ; 99.677,73.965 99.677,74.389 99.75,74.462
  Bottom Layer w0.2: v1(64.872,119.05) 65.126,118.796 v1(73.127,118.796) ; v1(84.709,66.243) 85.716,67.25 P13.1@86.5,67.25 ; v1(90.221,103.7) 90.221,114.935 90.627,115.341 97.859,115.341 P14.10@98.91,114.29
  Bottom Layer w0.254: v1(69.75,102.75) 71,102.75 ; v1(71,100.5) 71,102.75 ; v1(73.75,102.75) 71,102.75 ; P13.1@86.5,67.25 88.5,65.25 90.5,65.25 ; v1(90.75,83.25) 90.75,81.667 90.977,81.44 90.977,77.523 v1(91.5,77) ; P13.3@91.58,67.25 91.58,66.33 90.5,65.25 ; P13.5@96.66,67.25 96.5,67.09 96.5,65.25 90.5,65.25 ; v1(110.75,126) 112.25,127.5 v1(112.25,128)
3V3-ZIGBEE: C29.2 C30.2 P19.1 U8.1 U9.3 U10.11 | length 92.9
  Top Layer w0.2: U8.1@119.759,120.852 120.675,119.936 ; U10.11@124.145,105.566 125.171,105.566 125.451,105.845 125.451,118.364 124.765,119.05 121.561,119.05 120.675,119.936 ; U9.3@126.354,91.724 126.354,91.796 132.486,91.796 133.02,91.262 133.02,86.843 132.486,86.309 123.609,86.309 115.568,94.35 P19.1@115.568,117.042 116.659,115.951 120.396,115.951 120.675,116.23 120.675,119.936
  Top Layer w0.254: U9.3@126.354,91.724 126.424,91.794 C29.2@129.525,91.794 129.525,91.098 130.752,89.871 130.752,89.142 C30.2@131.75,88.144
3V3A: C24.2 C26.2 C27.2 U6.2 U7.3 | length 34.4
  Top Layer w0.254: v1(100.75,70.75) 100.823,70.823 100.823,73.535 101.015,73.727 101.577,73.727 U6.2@101.6,73.75 ; v1(104.5,63) 106.07,63 ; C24.2@106,64.75 106.07,64.68 106.07,63 ; U7.3@106.07,61.579 106.07,63 ; C27.2@108.475,73.05 108.475,72.025 v1(108.5,72) 109.65,70.85 C26.2@109.65,66.975 111,65.625 v1(111,63)
  Bottom Layer w0.254: v1(100.75,70.75) 102.077,72.077 105.946,72.077 106.023,72 v1(108.5,72) ; v1(104.5,63) v1(111,63)
5V0: C5.2 C6.2 C13.2 C25.2 C31.2 D4.1 L1.2 P2.2 P4.2 P5.2 P6.2 P7.2 P8.2 P9.2 P11.1 P14.6 P16.2 P20.2 R4.2 R6.2 R10.2 R11.2 R14.2 R15.2 R17.2 R18.2 R21.2 R24.2 R29.2 R31.2 U2.4 U3.2 U4.15 U7.2 U9.2 | length 902.5
  Top Layer w0.2: R6.2@55.05,121.25 55.853,120.447 60.247,120.447 R17.2@61.05,121.25 60.376,121.924 60.376,127.813 61.9,129.337 80.543,129.337 83.846,125.93 85.369,124.358 ; v1(68.758,39.751) 69.75,40.743 L1.2@69.75,42 ; R21.2@75.05,121.25 75.05,121.462 74,122.512 74,127.416 75.057,128.473 80.975,128.473 85.09,124.358 85.369,124.358 ; P11.1@86.25,38.5 v1(89.129,38.5) ; v1(112.674,32.004) 112.751,31.928 115.25,31.928 115.322,31.928 142.138,31.928 142.57,32.36 142.57,81.661 142.57,87.554 142.15,87.974 142.137,87.987 140.64,89.484 140.64,89.51 140.64,92.077 140.64,128.321 139.802,129.159 93.828,129.159 89.027,124.358 86.962,124.358 85.369,124.358
  Top Layer w0.254: v1(46.5,71) 49.75,71 ; R4.2@52.5,65.75 49.51,68.74 P2.2@49.51,68.75 49.75,68.99 49.75,71 ; P4.2@60.41,68.75 63.4,65.76 R18.2@63.4,65.75 58.15,71 49.75,71 ; R11.2@62.55,50.5 63.5,50.5 ; R14.2@62.55,54 63.5,54 ; R15.2@62.55,57.5 63.5,56.55 63.5,54 ; v1(66,33) C5.2@64.45,33 64.45,31.8 65.5,30.75 69.986,30.75 U2.4@70.784,31.548 ; v1(66,37.5) C6.2@64.45,37.5 ; P5.2@69.21,47.85 P6.2@69.21,50.4 P7.2@69.21,52.95 P8.2@69.21,55.5 ; L1.2@69.75,42 L1.2@70.25,42 68,39.75 66.7,39.75 C6.2@64.45,37.5 ; C13.2@77.25,59 77.646,59 78.5,58.146 79.091,58.146 80.07,57.167 U3.2@80.07,53.354 U3.2@80.07,50.854 80.07,49.57 v1(78.75,48.25) ; v1(80,39) P11.1@86.25,39 ; P9.2@83.66,125.75 R24.2@86.65,122.76 ; P11.1@86.25,38.5 P11.1@86.25,39 ; P14.6@93.83,114.29 93.83,115.67 86.75,122.75 R24.2@86.65,122.75 R24.2@86.65,122.76 ; v1(99.25,32.25) 105.65,32.25 R29.2@107.65,34.25 104.66,37.24 P16.2@104.66,37.25 ; C25.2@104.75,67.025 105.798,65.977 106.785,65.977 106.977,65.785 106.977,65.523 107.57,64.93 U7.2@107.57,61.379 U7.2@107.57,58.879 v1@107.57,55.75 ; U4.15@105.5,86.24 110.01,86.24 112,84.25 v1(112,60.5) ; v1(107.5,55.75) v1@107.57,55.75 ; v1(115.25,32) 116.25,31 140.981,31 141.904,31.923 142.135,31.923 142.577,32.365 142.577,81.654 142.15,82.081 R31.2@142.15,88 139.16,90.99 P20.2@139.16,91 ; U9.2@126.154,90.224 U9.2@123.654,90.224 123.654,91.154 125.544,93.044 C31.2@131.8,93.044 137.456,93.044 139.16,91.34 P20.2@139.16,91 ; 63.5,50.5 63.5,54 ; 63.5,50.5 63.5,47.25 63.25,47 R10.2@62.55,47 62.55,46.45 63.123,45.877 65.385,45.877 67.012,44.25 D4.1@67.5,44.25 67.5,42.362 67.273,42.135 67.273,41.411 66.535,40.673 66.423,40.673 64.45,38.7 C6.2@64.45,37.5 ; P11.1@86.25,39 87.25,39 91.25,43 104.75,43 107.57,45.82 v1@107.57,55.75 ; R24.2@86.65,122.76 86.65,124.046 87.277,124.673 87.277,127.277 89.169,129.169 142.204,129.169 143.169,128.204 143.169,93.669 141.577,92.077 140.623,92.077 139.546,91 P20.2@139.16,91
  Bottom Layer w0.2: v1(68.758,39.751) 73.254,35.255 79.858,35.255 84.277,30.836 111.506,30.836 v1(112.674,32.004) 110.541,34.138 89.129,34.138 v1(89.129,38.5)
  Bottom Layer w0.254: v1(46.5,71) 45.75,70.25 45.75,47 47.75,45 60,45 66,39 v1(66,37.5) ; P5.2@69.21,47.85 66.75,45.39 66.75,38.25 v1(66,37.5) ; v1(78.75,48.25) 78.75,38 78.25,37.5 ; v1(80,39) 78.5,37.5 78.25,37.5 ; v1(107.5,55.75) 108.75,55.75 112,59 v1(112,60.5) ; v1(115.25,32) 99.5,32 v1(99.25,32.25) 89.5,32.25 88.081,30.831 82.919,30.831 78.5,35.25 68.25,35.25 v1(66,33) v1(66,37.5) ; v1(66,37.5) 78.25,37.5